# EAGLE board LINC (EAGLE 5.11)

Size 101.58 x 66.98 mm. Coordinates in mm from the lower left corner, seen from the top.
Outline: 0,0 101.58,0 101.58,66.98 0,66.98 0,0
Copper layers (1*16): Top 0.035mm / dielectric 1.5mm / Bottom 0.035mm
Design rules "default": minimum track width 10mil, minimum drill 24mil, track to track 8mil, track to pad 8mil, pad to pad 8mil, via to via 8mil, smd to smd 8mil, copper to edge 40mil, drill to drill 8mil, minimum pad ring 10mil, minimum via ring 8mil, stop-mask expansion 4mil, vias tented up to drill 0mil, thermal gap 10mil

## Footprints (pad centres in the part's own frame; a part is rotated, then mirrored left to right if it is on the bottom)
2X3 = drill 1.016 pad 1.88 octagon: 1 0,0; 2 0,2.54; 3 2.54,0; 4 2.54,2.54; 5 5.08,0; 6 5.08,2.54
1206 = smd 1.6 x 1.8: 1 -1.4,0; 2 1.4,0
0603 = smd 1.1 x 1: 1 -0.85,0; 2 0.85,0
TQFP32-08 = smd 1.27 x 0.559: 1 -4.293,2.8; 2 -4.293,2; 3 -4.293,1.2; 4 -4.293,0.4; 5 -4.293,-0.4; 6 -4.293,-1.2; 7 -4.293,-2; 8 -4.293,-2.8; 17 4.293,-2.8; 18 4.293,-2; 19 4.293,-1.2; 20 4.293,-0.4; 21 4.293,0.4; 22 4.293,1.2; 23 4.293,2; 24 4.293,2.8 | smd 0.559 x 1.27: 9 -2.8,-4.293; 10 -2,-4.293; 11 -1.2,-4.293; 12 -0.4,-4.293; 13 0.4,-4.293; 14 1.2,-4.293; 15 2,-4.293; 16 2.8,-4.293; 25 2.8,4.293; 26 2,4.293; 27 1.2,4.293; 28 0.4,4.293; 29 -0.4,4.293; 30 -1.2,4.293; 31 -2,4.293; 32 -2.8,4.293
POWER_JACK_PTH = drill 2.997 pad 4.318 round: GND 0,7.7; GNDBREAK 4.7,10.7; PWR 0,13.7
INDUCTOR-1206 = smd 2.032 x 3.556: P$1 -2.54,0; P$2 2.54,0
LED10MM = drill 2.4 pad 3.7 round: A 2.54,0 | drill 2.4 pad 3.7 square: C -2.54,0
HC49/S = drill 0.813 round: 1 -2.413,0; 2 2.413,0
TRIM_POT_PTH = drill 1 pad 1.88 round: 1 -2.54,-2.54; 2 0,2.54; 3 2.54,-2.54
AXIAL-0.4 = drill 0.9 pad 1.88 round: P$1 -5.08,0; P$2 5.08,0
SWITCH-SPDT = drill 1.016 pad 1.88 round: 1 0,2.54; 2 0,0; 3 0,-2.54
SSOP28DB = smd 0.348 x 1.397: 1 -4.225,-3.656; 2 -3.575,-3.656; 3 -2.925,-3.656; 4 -2.275,-3.656; 5 -1.625,-3.656; 6 -0.975,-3.656; 7 -0.325,-3.656; 8 0.325,-3.656; 9 0.975,-3.656; 10 1.625,-3.656; 11 2.275,-3.656; 12 2.925,-3.656; 13 3.575,-3.656; 14 4.225,-3.656; 15 4.225,3.656; 16 3.575,3.656; 17 2.925,3.656; 18 2.275,3.656; 19 1.625,3.656; 20 0.975,3.656; 21 0.325,3.656; 22 -0.325,3.656; 23 -0.975,3.656; 24 -1.625,3.656; 25 -2.275,3.656; 26 -2.925,3.656; 27 -3.575,3.656; 28 -4.225,3.656
LCD-16X2 = drill 1.016 pad 1.88 square: 1 -32,15.5 | drill 1.016 pad 1.88 round: 2 -29.46,15.5; 3 -26.92,15.5; 4 -24.38,15.5; 5 -21.84,15.5; 6 -19.3,15.5; 7 -16.76,15.5; 8 -14.22,15.5; 9 -11.68,15.5; 10 -9.14,15.5; 11 -6.6,15.5; 12 -4.06,15.5; 13 -1.52,15.5; 14 1.02,15.5; 15 3.56,15.5; 16 6.1,15.5 | hole 2.8: -37.5,15.5; -37.5,-15.5; 37.5,15.5; 37.5,-15.5
RN41 = smd 0.8 x 1.6: 1 -6.6,-6.6; 2 -5.4,-6.6; 3 -4.2,-6.6; 4 -3,-6.6; 5 -1.8,-6.6; 6 -0.6,-6.6; 7 0.6,-6.6; 8 1.8,-6.6; 9 3,-6.6; 10 4.2,-6.6; 11 5.4,-6.6; 12 6.6,-6.6; 13 6.6,6.6; 14 5.4,6.6; 15 4.2,6.6; 16 3,6.6; 17 1.8,6.6; 18 0.6,6.6; 19 -0.6,6.6; 20 -1.8,6.6; 21 -3,6.6; 22 -4.2,6.6; 23 -5.4,6.6; 24 -6.6,6.6 | smd 1.6 x 0.8: 25 -9.4,4.8; 26 -9.4,3.2; 27 -9.4,1.6; 28 9.4,3.1; 29 9.4,-3.1; 30 9.4,-4.122; 31 9.4,-1.9; 32 9.4,-0.7; 33 9.4,0.7; 34 9.4,1.9; 35 9.4,4.122
SI-50170 = drill 0.9 pad 1.5 round: 1 4.445,5.842; 2 3.175,3.302; 3 1.905,5.842; 4 0.635,3.302; 5 -0.635,5.842; 6 -1.905,3.302; 7 -3.175,5.842; 8 -4.445,3.302 | drill 1.016 pad 1.5 round: A1 -5.461,10.668; A2 2.921,10.668; C1 -2.921,10.668; C2 5.461,10.668 | drill 1.6 pad 2.2 round: S1 -7.747,0; S2 7.747,0 | hole 3.251: -5.715,-3.048; 5.715,-3.048

## Placement (x,y rotation side)
AVR_ISP  AVR_SPI_PRG_6PTH  [2X3]  6.35,38.1 90 top
C1  0.1uF  [1206]  66.04,22.86 0 top
C2  0.1uF  [1206]  66.04,17.78 0 top
C3  0.1uF  [1206]  66.04,12.7 0 top
C4  22pF  [1206]  41.91,34.29 180 top
C5  22pF  [1206]  41.91,20.32 180 top
C6  0.1uF  [1206]  66.04,7.62 0 top
C7  0.1uF  [1206]  66.04,2.54 0 top
C8  0.1uF  [1206]  66.04,27.94 0 top
C9  0.1uF  [1206]  66.04,33.02 0 top
C10  0.1uF  [1206]  81.28,50.8 0 top
C11  0.1uF  [1206]  81.28,36.83 0 top
C13  0.1uF  [1206]  53.34,17.78 0 top
C15  10uF  [1206]  53.34,2.54 0 top
F2  PTC0603  [0603]  24.13,19.05 0 top
IC3  MEGA8-AI  [TQFP32-08]  44.45,43.18 0 top
J2  POWER_JACKPTH  [POWER_JACK_PTH]  1.27,10.16 270 top
L1  [INDUCTOR-1206]  44.45,5.08 0 top
LED1  [LED10MM]  8.89,24.13 0 top
Q1  16MHz  [HC49/S]  43.18,27.94 0 top
Q2  [HC49/S]  81.28,43.18 0 top
R1  49.9/1%  [1206]  44.45,11.43 0 top
R2  49.9/1%  [1206]  44.45,15.24 0 top
R3  49.9/1%  [1206]  53.34,33.02 0 top
R4  49.9/1%  [1206]  53.34,7.62 0 top
R5  180  [1206]  53.34,27.94 0 top
R8  TRIMPOTPTH  [TRIM_POT_PTH]  7.62,52.07 0 top
R9  100  [AXIAL-0.4]  43.18,53.34 0 top
R10  180  [1206]  53.34,22.86 0 top
R11  180  [1206]  53.34,12.7 0 top
S2  [SWITCH-SPDT]  29.21,7.62 270 top
U1  [SSOP28DB]  64.77,45.72 270 top
U2  LCD-16X2SILK  [LCD-16X2]  52.07,46.99 0 bottom
U$1  BLUETOOTH-RN41"  [RN41]  24.13,34.29 270 top
X1  SI-50170  [SI-50170]  85.09,20.32 90 top

## Library data of the parts
AVR_ISP C1-C11 C13 C15 F2 J2 L1 LED1 R1-R5 R8-R11 S2 U1 U2 U$1 = SparkFun
IC3 = atmel; MPN: ATMEGA8-16AU; OC_FARNELL: 9171371; OC_NEWARK: 73M8863
Q1 Q2 = crystal; OC_FARNELL: 1667008; OC_NEWARK: unknown
X1 = con-stewart; OC_FARNELL: unknown; OC_NEWARK: unknown

## Nets
3.3V: C13.1 L1.P$1 U1.25
+5V: R8.1 R9.P$2 U2.2
DATA1: U2.11
DATA2: U2.12
DATA3: U2.13
DATA4: U2.14
E: U2.6
E_CS: U1.9
E_INT: IC3.32 U1.4
GND: AVR_ISP.6 C1.2 C2.2 C3.2 C4.2 C5.2 C6.2 C7.2 C8.2 C9.2 C10.1 C11.1 C13.2 C15.2 IC3.3 IC3.5 IC3.21 J2.GND J2.GNDBREAK LED1.C R5.1 R8.3 R10.1 R11.1 U1.2 U1.11 U1.18 U1.21 U1.22 U2.1 U2.5 U2.7 U2.8 U2.9 U2.10 U2.16 U$1.1 U$1.12 U$1.25 U$1.27 U$1.28 U$1.29
LEDA: U1.27 X1.A1
LEDB: U1.26 X1.A2
MISO: AVR_ISP.1 IC3.16 U1.6
MOSI: AVR_ISP.4 IC3.15 U1.7
N$1: U$1.15 U$1.16
N$2: C4.1 IC3.7 Q1.2
N$3: R10.2 X1.C1
N$4: C5.1 IC3.8 Q1.1
N$5: R11.2 X1.C2
N$6: C2.1 X1.8
N$7: C1.1 R2.2 R3.2
N$8: F2.2 S2.2
N$9: F2.1 J2.PWR
N$10: C6.1 C7.1 C8.1 C9.1 U1.15 U1.19 U1.20 U1.28
N$11: C3.1 L1.P$2 R1.2 R4.2 X1.2
N$12: C15.1 U1.1
N$13: C11.2 Q2.1 U1.23
N$14: C10.2 Q2.2 U1.24
N$15: R5.2 U1.14
N$16: R8.2 U2.3
N$27: R9.P$1 U2.15
RS: U2.4
RST: AVR_ISP.5 IC3.29 U1.10
RX: IC3.30 U$1.14
SCK: AVR_ISP.3 IC3.17 U1.8
TPIN+: R2.1 U1.13 X1.4
TPIN-: R3.1 U1.12 X1.6
TPOUT+: R1.1 U1.17 X1.1
TPOUT-: R4.1 U1.16 X1.3
TX: IC3.31 U$1.13
VCC: AVR_ISP.2 IC3.4 IC3.6 IC3.18 IC3.20 LED1.A S2.1 U$1.11

## Tracks (layer width: path | path; a pad name or v marks a point on that pad's centre or on a via)
3.3V  (2 unrouted)
+5V  (2 unrouted)
E_INT  (1 unrouted)
GND  (41 unrouted)
LEDA  (1 unrouted)
LEDB  (1 unrouted)
MISO  (2 unrouted)
MOSI  (2 unrouted)
N$1  (1 unrouted)
N$2  (2 unrouted)
N$3  (1 unrouted)
N$4  (2 unrouted)
N$5  (1 unrouted)
N$6  (1 unrouted)
N$7  (2 unrouted)
N$8  (1 unrouted)
N$9  (1 unrouted)
N$10  (7 unrouted)
N$11  (4 unrouted)
N$12  (1 unrouted)
N$13  (2 unrouted)
N$14  (2 unrouted)
N$15  (1 unrouted)
N$16  (1 unrouted)
N$27  (1 unrouted)
RST  (2 unrouted)
RX  (1 unrouted)
SCK  (2 unrouted)
TPIN+  (2 unrouted)
TPIN-  (2 unrouted)
TPOUT+  (2 unrouted)
TPOUT-  (2 unrouted)
TX  (1 unrouted)
VCC  (7 unrouted)